# EAGLE board LCmeter0-LCD-8pinlcd-alt2 (EAGLE 7.6.0)
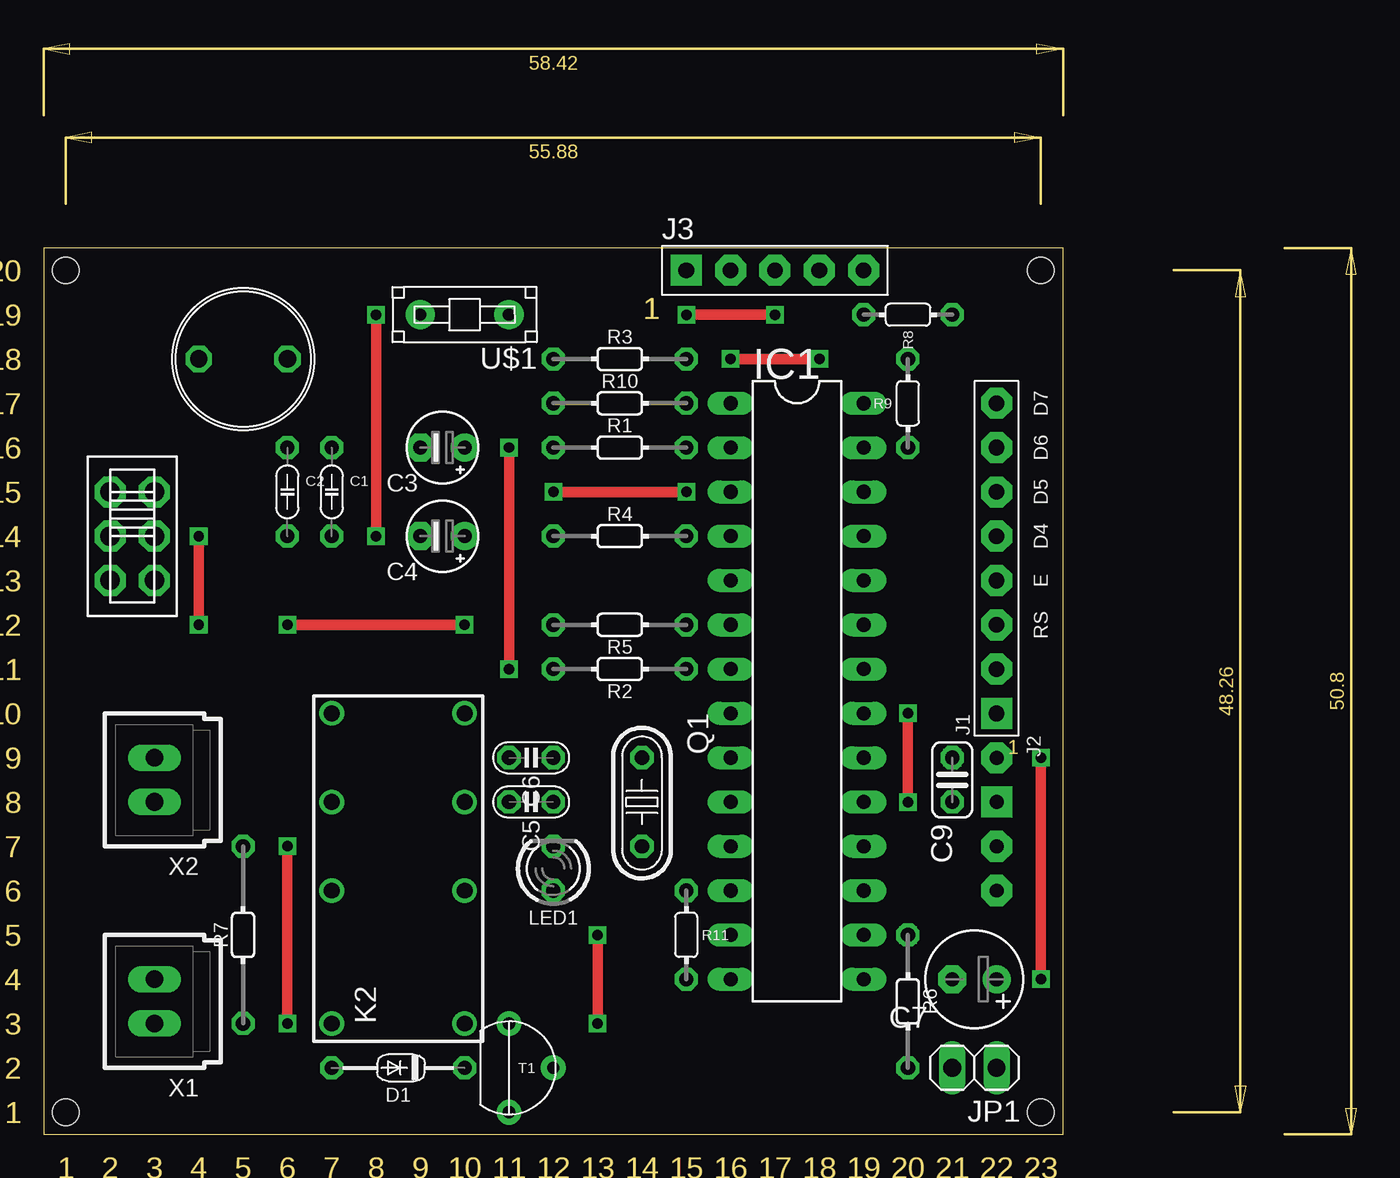
[diagram p0: board, top side]
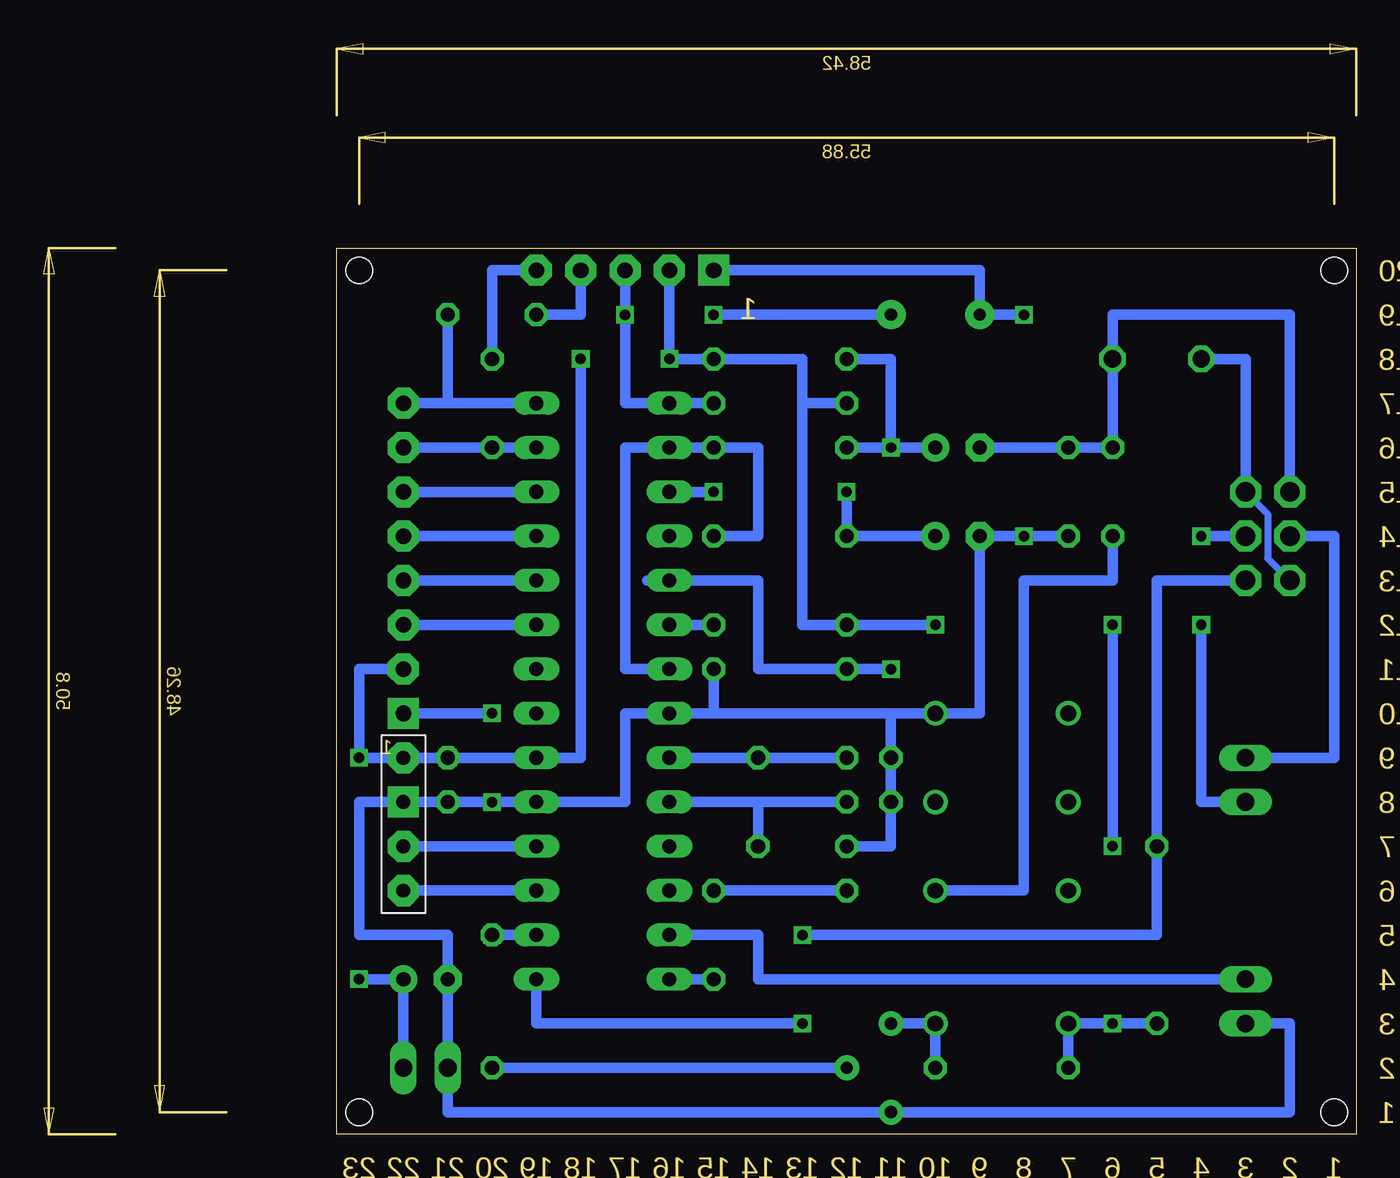
[diagram p1: board, bottom side, seen from below]

Size 58.42 x 50.8 mm. Coordinates in mm from the lower left corner, seen from the top.
Outline: 0,0 58.42,0 58.42,50.8 0,50.8 0,0
Copper layers (1*16): Top 0.035mm / dielectric 1.5mm / Bottom 0.035mm
Design rules "default": minimum track width 10mil, minimum drill 24mil, track to track 8mil, track to pad 8mil, pad to pad 8mil, via to via 8mil, smd to smd 8mil, copper to edge 40mil, drill to drill 8mil, minimum pad ring 10mil, minimum via ring 8mil, stop-mask expansion 4mil, vias tented up to drill 0mil, thermal gap 10mil
Holes 1.5 mm at 1.27,49.53 57.15,49.53 57.15,1.27 1.27,1.27

## Footprints (pad centres in the part's own frame; a part is rotated, then mirrored left to right if it is on the bottom)
C050-020X036 = drill 0.813 octagon: 1 0,2.54; 2 0,-2.54
E2,5-4 = drill 0.813 pad 1.6: + 1.27,0 | drill 0.813 pad 1.6 octagon: - -1.27,0
C025-020X036 = drill 0.813 octagon: 1 0,1.27; 2 0,-1.27
E2,5-6 = drill 0.813 pad 1.6: + -1.27,0 | drill 0.813 pad 1.6 octagon: - 1.27,0
C025-024X044 = drill 0.813 octagon: 1 -1.27,0; 2 1.27,0
DO34-7 = drill 0.813 octagon: A 3.81,0; C -3.81,0
DIL28-3 = drill 0.813 long: 1 -16.51,-3.81; 2 -13.97,-3.81; 3 -11.43,-3.81; 4 -8.89,-3.81; 5 -6.35,-3.81; 6 -3.81,-3.81; 7 -1.27,-3.81; 8 1.27,-3.81; 9 3.81,-3.81; 10 6.35,-3.81; 11 8.89,-3.81; 12 11.43,-3.81; 13 13.97,-3.81; 14 16.51,-3.81; 15 16.51,3.81; 16 13.97,3.81; 17 11.43,3.81; 18 8.89,3.81; 19 6.35,3.81; 20 3.81,3.81; 21 1.27,3.81; 22 -1.27,3.81; 23 -3.81,3.81; 24 -6.35,3.81; 25 -8.89,3.81; 26 -11.43,3.81; 27 -13.97,3.81; 28 -16.51,3.81
CONN-8P = drill 0.9 pad 1.778 square: 1 0,0 | drill 0.9 pad 1.778 octagon: 2 2.54,0; 3 5.08,0; 4 7.62,0; 5 10.16,0; 6 12.7,0; 7 15.24,0; 8 17.78,0
PIC-UART = drill 0.8 pad 1.778 octagon: 17 1.27,1.27; 18 3.81,1.27; 20 8.89,1.27 | drill 0.8 pad 1.778 square: 19 6.35,1.27
CONN-5P = drill 0.9 pad 1.778 square: 1 0,0 | drill 0.9 pad 1.778 octagon: 2 2.54,0; 3 5.08,0; 4 7.62,0; 5 10.16,0
1X02 = drill 1.016 long: 1 -1.27,0; 2 1.27,0
DS2Y = drill 0.9: 1 -8.89,-3.81; 4 -1.27,-3.81; 6 3.81,-3.81; 8 8.89,-3.81; 9 8.89,3.81; 11 3.81,3.81; 13 -1.27,3.81; 16 -8.89,3.81
L-09R = drill 1 octagon: P$1 -2.54,0; P$2 2.54,0
LED3MM = drill 0.813 octagon: A -1.27,0; K 1.27,0
HC49 = drill 0.813 octagon: 1 -2.54,0; 2 2.54,0
0202/7 = drill 0.813 octagon: 1 0,-3.81; 2 0,3.81
0202/10 = drill 0.813 octagon: 1 0,-5.08; 2 0,5.08
0202/5 = drill 0.813 octagon: 1 0,-2.54; 2 0,2.54
SLSW-2P2T = drill 1.118 pad 1.778 octagon: 1 -1.27,2.54; 2 -1.27,0; 3 -1.27,-2.54; 4 1.27,2.54; 5 1.27,0; 6 1.27,-2.54
TO92-CBE-A = drill 0.7 pad 1.422: B 2.54,0; C 0,2.54; E 0,-2.54
PB-1P1T = drill 0.7 pad 1.676: 1 2.54,0; 2 -2.54,0
70543-02 = drill 1.016 long: 1 -1.27,0; 2 1.27,0

## Placement (x,y rotation side)
C1  1nF  [C050-020X036]  16.51,36.83 0 top
C2  1nF  [C050-020X036]  13.97,36.83 0 top
C3  10μF  [E2,5-4]  22.86,39.37 0 top
C4  10μF  [E2,5-4]  22.86,34.29 0 top
C5  33pF  [C025-020X036]  27.94,19.05 90 top
C6  33pF  [C025-020X036]  27.94,21.59 90 top
C7  100μF  [E2,5-6]  53.34,8.89 180 top
C9  100nF  [C025-024X044]  52.07,20.32 270 top
D1  1N4148  [DO34-7]  20.32,3.81 180 top
IC1  PIC16F876A-X/SP  [DIL28-3]  43.18,25.4 270 top
J1  HD44780-4BIT-8PIN  [CONN-8P]  54.61,24.13 90 top
J2  PIC-UART  [PIC-UART]  55.88,12.7 90 top
J3  PIC-ICSP  [CONN-5P]  36.83,49.53 0 top
JP1  [1X02]  53.34,3.81 180 top
K2  DS2Y  [DS2Y]  20.32,15.24 90 top
L1  100μH  [L-09R]  11.43,44.45 0 top
LED1  TLLG4400  [LED3MM]  29.21,15.24 90 top
Q1  20MHz  [HC49]  34.29,19.05 270 top
R1  100kΩ  [0202/7]  33.02,39.37 270 top
R2  100kΩ  [0202/7]  33.02,26.67 90 top
R3  100kΩ  [0202/7]  33.02,44.45 270 top
R4  47kΩ  [0202/7]  33.02,34.29 270 top
R5  4.7kΩ  [0202/7]  33.02,29.21 90 top
R6  10kΩ  [0202/7]  49.53,7.62 180 top
R7  10kΩ  [0202/10]  11.43,11.43 0 top
R8  100  [0202/5]  49.53,46.99 270 top
R9  100  [0202/5]  49.53,41.91 180 top
R10  4.7kΩ  [0202/7]  33.02,41.91 270 top
R11  1k  [0202/5]  36.83,11.43 0 top
S1  SL-SW-2P-2T  [SLSW-2P2T]  5.08,34.29 0 top
T1  BC547CBE-A  [TO92-CBE-A]  26.67,3.81 0 top
U$1  PB-1P-1T  [PB-1P1T]  24.13,46.99 180 top
X1  FREQ  [70543-02]  6.35,7.62 90 top
X2  L/C  [70543-02]  6.35,20.32 90 top

## Library data of the parts
C1-C7 = c
C9 = rcl
D1 = d
IC1 = mcu
J1-J3 = pinconn
JP1 = pinhead
K2 = relay; MPN: DS2Y-S-DC5V; OC_FARNELL: unknown; OC_NEWARK: 13P3268
L1 R1-R11 = r
LED1 = led; MF: VISHAY SEMICONDUCTOR; OC_FARNELL: 1612435
Q1 = q
S1 U$1 = sw
T1 = t
X1 X2 = con-molex; OC_FARNELL: unknown; OC_NEWARK: unknown

## Nets
/LC: IC1.15 R7.2 S1.6
/MCLR: IC1.1 J3.3 R10.2 U$1.2
/RELAY: D1.C K2.1 T1.C
A0: IC1.2 IC1.7 R1.2 R4.2
A1: C4.+ IC1.3 R4.1
A3: C3.+ IC1.5 R1.1 R2.2 R3.1
A4: IC1.6 R5.1
C2_CON: C2.2 K2.4
D4: IC1.25 J1.5
D5: IC1.26 J1.6
D6: IC1.27 J1.7 R9.2
D7: IC1.28 J1.8 R8.2
E: IC1.24 J1.4
FREQ: IC1.13 X1.2
GND: C1.2 C4.- C5.1 C6.1 C7.- C9.2 IC1.8 IC1.19 J1.1 J2.19 J3.1 JP1.2 K2.8 LED1.K R2.1 T1.E U$1.1 X1.1
M+: S1.2 X2.2
M-: S1.5 X2.1
N$1: J3.4 R8.1
N$2: C1.1 C2.1 C3.- L1.P$2 S1.1
N$3: J3.5 R9.1
N$4: IC1.14 R11.1
N$5: R6.2 T1.B
N$6: LED1.A R11.2
N$7: L1.P$1 S1.3 S1.4
N$8: IC1.17 J2.17
OSC1: C6.2 IC1.9 Q1.1
OSC2: C5.2 IC1.10 Q1.2
RC5: IC1.16 R6.1
RS: IC1.23 J1.3
RX: IC1.18 J2.18
VCC: C7.+ C9.1 D1.A IC1.20 J1.2 J2.20 J3.2 JP1.1 K2.16 R3.2 R5.2 R7.1 R10.1

## Tracks (layer width: path | path; a pad name or v marks a point on that pad's centre or on a via)
/LC  (via drill 0.6)
  Top 0.61: v31.75,11.43 v31.75,6.35
  Bottom 0.61: IC1.15 46.99,6.35 v31.75,6.35 34.12,6.35 | v31.75,11.43 11.43,11.43 R7.2 11.43,31.75 S1.6
/MCLR  (via drill 0.6)
  Top 0.61: v36.83,46.99 v41.91,46.99
  Bottom 0.61: J3.3 v41.91,46.99 41.91,41.91 IC1.1 R10.2 | v36.83,46.99 U$1.2
/RELAY
  Bottom 0.61: T1.C K2.1 D1.C
A0
  Bottom 0.61: IC1.7 41.91,26.67 41.91,39.37 IC1.2 R1.2 34.29,39.37 34.29,34.29 R4.2
A1  (via drill 0.6)
  Top 0.61: v29.21,36.83 v36.83,36.83
  Bottom 0.61: v36.83,36.83 IC1.3 | C4.+ R4.1 v29.21,36.83
A3  (via drill 0.6)
  Top 0.61: v26.67,39.37 v26.67,26.67
  Bottom 0.61: 40.64,31.75 IC1.5 34.29,31.75 34.29,26.67 R2.2 v26.67,26.67 | R3.1 26.67,44.45 v26.67,39.37 | v26.67,39.37 R1.1 | v26.67,39.37 C3.+
A4
  Bottom 0.61: R5.1 IC1.6
C2_CON
  Bottom 0.61: K2.4 19.05,13.97 19.05,31.75 13.97,31.75 C2.2
D4
  Bottom 0.61: J1.5 IC1.25
D5
  Bottom 0.61: J1.6 IC1.26
D6
  Bottom 0.61: R9.2 IC1.27 J1.7
D7
  Bottom 0.61: R8.2 52.07,41.91 | J1.8 52.07,41.91 | 52.07,41.91 IC1.28
E
  Bottom 0.61: J1.4 IC1.24
FREQ
  Bottom 0.61: X1.2 34.29,8.89 34.29,11.43 IC1.13
GND  (via drill 0.6)
  Top 0.61: v49.53,24.13 v49.53,19.05 | v19.05,46.99 v19.05,34.29
  Bottom 0.61: 36.83,24.13 IC1.8 41.91,24.13 41.91,19.05 IC1.19 v49.53,19.05 C9.2 J2.19 57.15,19.05 57.15,11.43 52.07,11.43 C7.- JP1.2 52.07,1.27 T1.E 3.81,1.27 3.81,6.35 X1.1 | 26.67,24.13 C6.1 C5.1 26.67,16.51 LED1.K | 26.67,24.13 36.83,24.13 | 36.83,24.13 R2.1 | 26.67,24.13 K2.8 21.59,24.13 C4.- v19.05,34.29 C1.2 | v49.53,24.13 J1.1 | J3.1 21.59,49.53 U$1.1 v19.05,46.99
M+
  Bottom 0.61: X2.2 1.27,21.59 1.27,34.29 S1.2
M-  (via drill 0.6)
  Top 0.61: v8.89,29.21 v8.89,34.29
  Bottom 0.61: X2.1 8.89,19.05 v8.89,29.21 | v8.89,34.29 S1.5
N$1
  Bottom 0.61: J3.4 44.45,46.99 R8.1
N$2
  Bottom 0.61: C3.- C1.1 C2.1 L1.P$2 13.97,46.99 3.81,46.99 S1.1
N$3
  Bottom 0.61: J3.5 49.53,49.53 R9.1
N$4
  Bottom 0.61: R11.1 IC1.14
N$5
  Bottom 0.61: R6.2 T1.B
N$6
  Bottom 0.61: LED1.A R11.2
N$7
  Bottom 0.406: S1.4 5.08,35.56 5.08,33.02 S1.3
  Bottom 0.61: S1.4 6.35,44.45 L1.P$1
N$8
  Bottom 0.61: IC1.17 J2.17
OSC1
  Bottom 0.61: C6.2 Q1.1 IC1.9
OSC2
  Bottom 0.61: IC1.10 34.29,19.05 | Q1.2 34.29,19.05 | 34.29,19.05 C5.2
RC5  (via drill 0.6)
  Bottom 0.61: R6.1 IC1.16
  other vias: 49.53,11.43
RS
  Bottom 0.61: J1.3 IC1.23
RX
  Bottom 0.61: IC1.18 J2.18
VCC  (via drill 0.6)
  Top 0.61: v57.15,8.89 v57.15,21.59 | v13.97,16.51 v13.97,6.35 | v13.97,29.21 v24.13,29.21 | v44.45,44.45 v39.37,44.45
  Bottom 0.61: D1.A K2.16 v13.97,6.35 R7.1 | J1.2 57.15,26.67 v57.15,21.59 J2.20 C9.1 IC1.20 44.45,21.59 v44.45,44.45 | JP1.1 C7.+ v57.15,8.89 | 31.75,41.91 31.75,29.21 R5.2 v24.13,29.21 | 31.75,41.91 31.75,44.45 R3.2 v39.37,44.45 J3.2 | v13.97,16.51 v13.97,29.21 | R10.1 31.75,41.91
  other vias: 52.07,21.59

## Text on the board
Dimension: 20 | 19 | 18 | 17 | 16 | 15 | 14 | 13 | 12 | 11 | 10 | 9 | 8 | 7 | 6 | 5 | 4 | 3 | 2 | 1 | 1 | 2 | 3 | 4 | 5 | 6 | 7 | 8 | 9 | 10 | 11 | 12 | 13 | 14 | 15 | 16 | 17 | 18 | 19 | 20 | 21 | 22 | 23
tPlace: D7 | D6 | D5 | D4 | E | RS